# Altium PCB Buckv7.PcbDoc
Units mil, origin at the board's own origin, x right, y up, seen from the top; angles counter-clockwise.
Board outline 6889.76 x 2559.06 mil, 2 copper layers (Top Layer, Bottom Layer); 18 components, 9 nets, 122 pads, 0 vias.
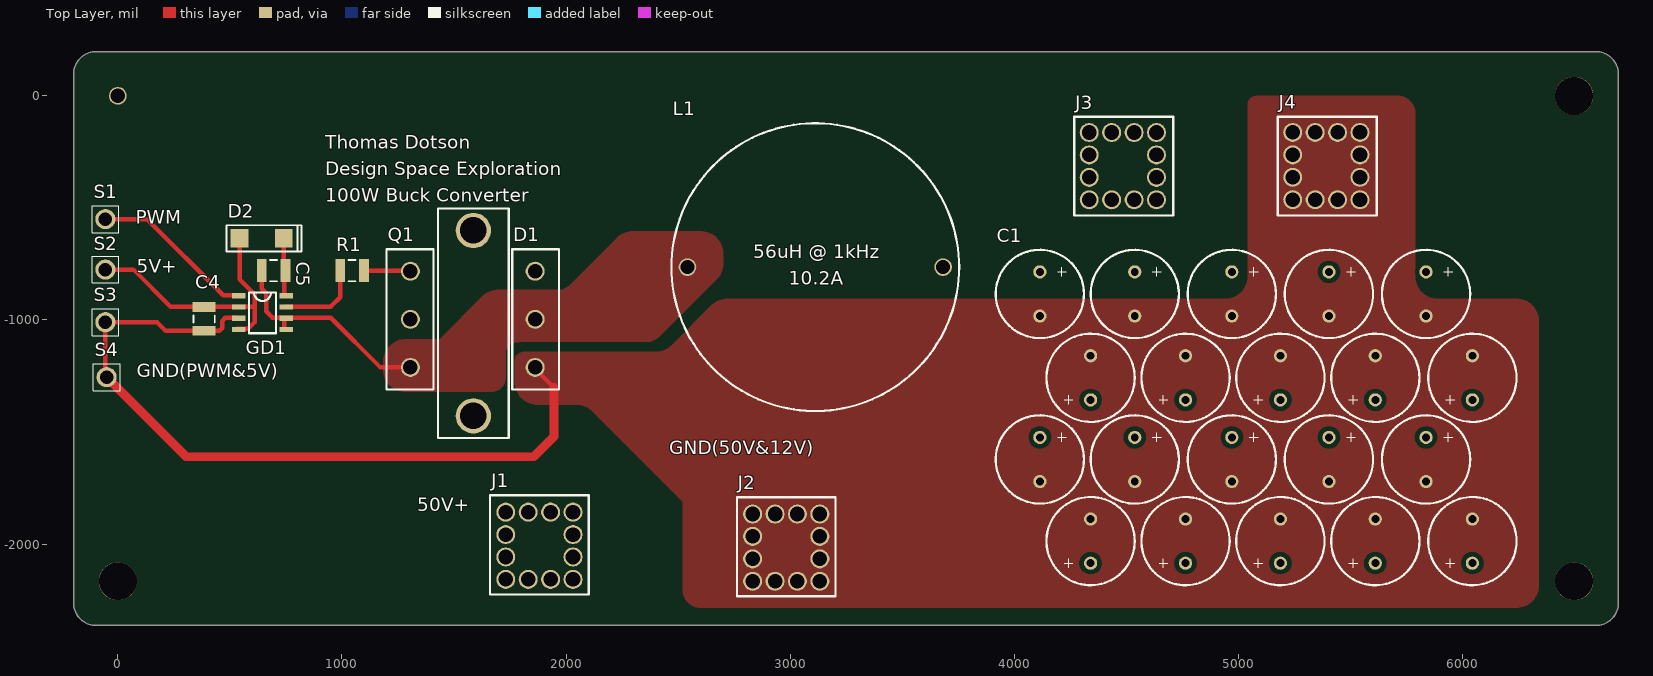
[diagram p0: Top Layer view]
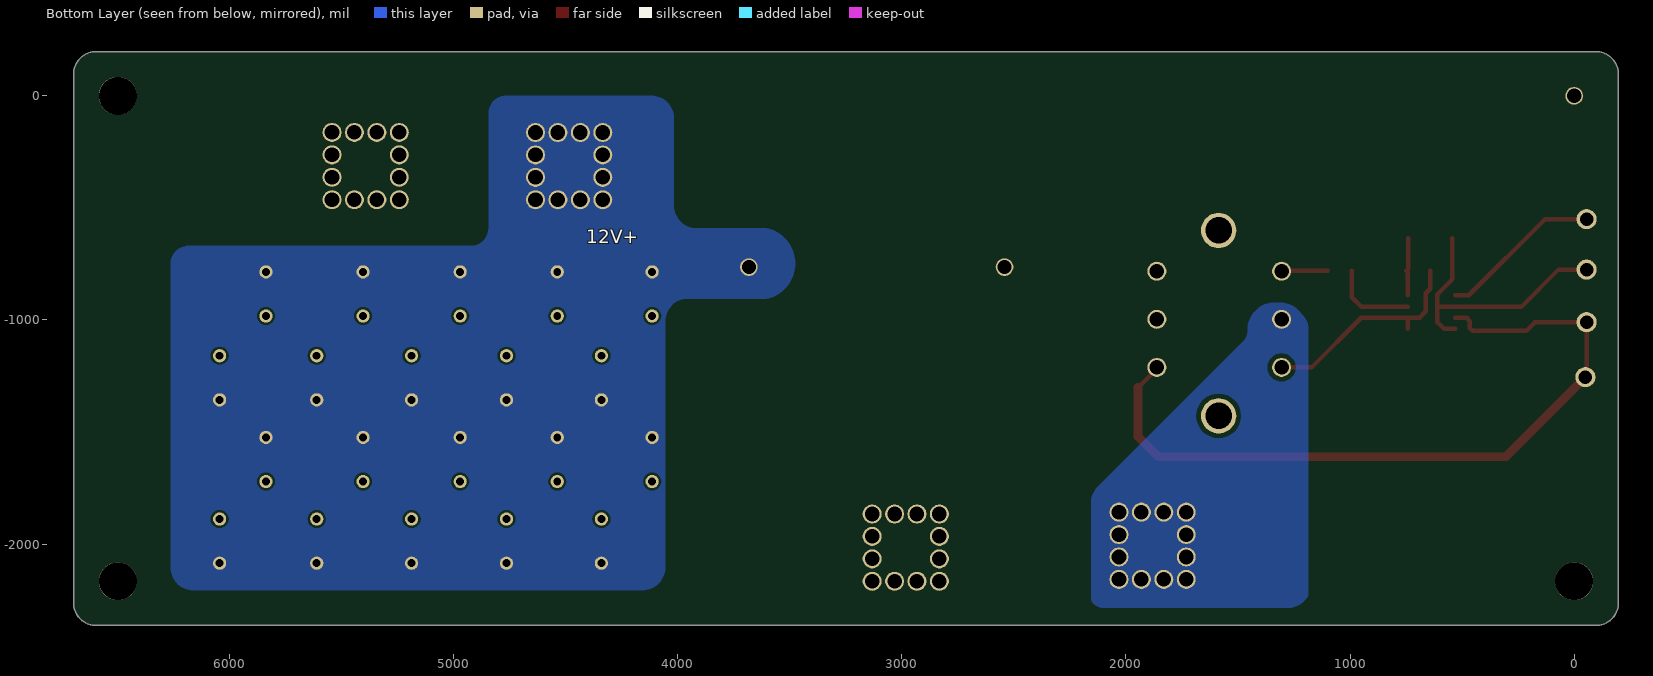
[diagram p1: Bottom Layer view, seen from below]

## Layer stack, top to bottom
Top Solder: solder mask 0.4, Solder Resist, Dk 3.5
Top Layer: signal copper 2.7559
Dielectric 1: dielectric 12.6, FR-4, Dk 4.8
Bottom Layer: signal copper 2.7559
Bottom Solder: solder mask 0.4, Solder Resist, Dk 3.5

## Board outline
-96.85,196.85 ccw(c-96.85,96.85) -196.85,96.85 -196.85,-2262.2 ccw(c-96.85,-2262.2) -96.85,-2362.2 6592.91,-2362.2 ccw(c6592.91,-2262.2) 6692.91,-2262.2 6692.91,96.85 ccw(c6592.91,96.85) 6592.91,196.85
cut-out: 570.39,-3440.16
cut-out: 2405.2,-2853.31

## Design rules (kind name [scope] priority, off if disabled: settings)
Clearance Clearance_1 [InNamedPolygon('Bottom Layer-No Net 8')] p1: gap=10 ignorepadtopadclearanceinfootprint=FALSE except(0: Arc-Hole Track-Hole SMDPad-Hole THPad-Hole Via-Hole Fill-Hole Poly-Hole Region-Hole Text-Hole)
Clearance [All] p2: gap=20 ignorepadtopadclearanceinfootprint=FALSE except(0: Arc-Text Track-Text SMDPad-Text THPad-Text Via-Text Fill-Text Poly-Text Region-Text Text-Text; 10: Arc-SMDPad Track-SMDPad)
ComponentClearance [All] p1: gap=5 collisioncheckmode=3 verticalgap=10 showdistances=FALSE
HoleSize [All] p1: absolutevalues=TRUE maxlimit=180 minlimit=1 maxpercent=80.000 minpercent=20.000
PolygonConnect PolygonConnect_20 [All vs IsNamedPolygon('Top Layer-VG-')] p1: connectstyle=Direct reliefconductorwidth=10 reliefentries=4 polygonreliefangle="90 Angle" airgapwidth=10
PolygonConnect PolygonConnect_19 [All vs IsNamedPolygon('Top Layer-VG-')] p2: connectstyle=Direct reliefconductorwidth=10 reliefentries=4 polygonreliefangle="90 Angle" airgapwidth=10
PolygonConnect PolygonConnect_18 [All vs IsNamedPolygon('Top Layer-VG-')] p3: connectstyle=Direct reliefconductorwidth=10 reliefentries=4 polygonreliefangle="90 Angle" airgapwidth=10
PolygonConnect PolygonConnect_17 [All vs IsNamedPolygon('Top Layer-VG-')] p4: connectstyle=Direct reliefconductorwidth=10 reliefentries=4 polygonreliefangle="90 Angle" airgapwidth=10
PolygonConnect PolygonConnect_16 [All vs IsNamedPolygon('Bottom Layer-No Net 8')] p5: connectstyle=Direct reliefconductorwidth=10 reliefentries=4 polygonreliefangle="90 Angle" airgapwidth=10
PolygonConnect PolygonConnect_15 [All vs IsNamedPolygon('Top Layer-No Net 5')] p6: connectstyle=Direct reliefconductorwidth=10 reliefentries=4 polygonreliefangle="90 Angle" airgapwidth=10
PolygonConnect PolygonConnect_14 [All vs IsNamedPolygon('Top Layer-No Net 7')] p7: connectstyle=Direct reliefconductorwidth=10 reliefentries=4 polygonreliefangle="90 Angle" airgapwidth=10
PolygonConnect PolygonConnect_13 [All vs IsNamedPolygon('Top Layer-No Net')] p8: connectstyle=Direct reliefconductorwidth=10 reliefentries=4 polygonreliefangle="90 Angle" airgapwidth=10
PolygonConnect PolygonConnect_12 [All vs IsNamedPolygon('Bottom Layer-No Net 8')] p9: connectstyle=Direct reliefconductorwidth=10 reliefentries=4 polygonreliefangle="90 Angle" airgapwidth=10
PolygonConnect PolygonConnect_11 [All vs IsNamedPolygon('Top Layer-VG-')] p10: connectstyle=Direct reliefconductorwidth=10 reliefentries=4 polygonreliefangle="90 Angle" airgapwidth=10
PolygonConnect PolygonConnect_10 [All vs IsNamedPolygon('Bottom Layer-No Net 4')] p11: connectstyle=Direct reliefconductorwidth=10 reliefentries=4 polygonreliefangle="90 Angle" airgapwidth=10
PolygonConnect PolygonConnect_9 [All vs IsNamedPolygon('Top Layer-No Net 11')] p12: connectstyle=Direct reliefconductorwidth=10 reliefentries=4 polygonreliefangle="90 Angle" airgapwidth=10
PolygonConnect PolygonConnect_8 [All vs IsNamedPolygon('Top Layer-No Net 12')] p13: connectstyle=Direct reliefconductorwidth=10 reliefentries=4 polygonreliefangle="90 Angle" airgapwidth=10
PolygonConnect PolygonConnect_7 [All vs IsNamedPolygon('Top Layer-No Net 12')] p14: connectstyle=Direct reliefconductorwidth=10 reliefentries=4 polygonreliefangle="90 Angle" airgapwidth=10
PolygonConnect PolygonConnect_6 [All vs IsNamedPolygon('Top Layer-No Net 10')] p15: connectstyle=Direct reliefconductorwidth=10 reliefentries=4 polygonreliefangle="90 Angle" airgapwidth=10
PolygonConnect PolygonConnect_5 [All vs IsNamedPolygon('Top Layer-No Net 10')] p16: connectstyle=Direct reliefconductorwidth=10 reliefentries=4 polygonreliefangle="90 Angle" airgapwidth=10
PolygonConnect PolygonConnect_4 [All vs IsNamedPolygon('Bottom Layer-NetJ1_1')] p17: connectstyle=Direct reliefconductorwidth=10 reliefentries=4 polygonreliefangle="90 Angle" airgapwidth=10
PolygonConnect PolygonConnect_3 [All vs IsNamedPolygon('Top Layer-No Net 6') Or  IsNamedPolygon('Top Overlay-No Net')] p18: connectstyle=Direct reliefconductorwidth=10 reliefentries=4 polygonreliefangle="90 Angle" airgapwidth=10
PolygonConnect PolygonConnect_2 [All vs IsNamedPolygon('Bottom Layer-NetJ1_1')] p19: connectstyle=Direct reliefconductorwidth=10 reliefentries=4 polygonreliefangle="90 Angle" airgapwidth=10
PolygonConnect PolygonConnect_1 [All vs IsNamedPolygon('Bottom Layer-NetJ1_1')] p20: thpad.connectstyle=Direct thpad.reliefconductorwidth=10 thpad.reliefentries=4 thpad.polygonreliefangle="90 Angle" thpad.airgapwidth=10 smdpad.connectstyle=Relief smdpad.reliefconductorwidth=10 smdpad.reliefentries=4 smdpad.polygonreliefangle="90 Angle" smdpad.airgapwidth=10 via.connectstyle=Relief via.reliefconductorwidth=10 via.reliefentries=4 via.polygonreliefangle="90 Angle" via.airgapwidth=10
PolygonConnect [All] p21: connectstyle=Relief reliefconductorwidth=10 reliefentries=4 polygonreliefangle="90 Angle" airgapwidth=10
RoutingVias [All] p1: holewidth=28 width=50 viastyle="Through Hole" minholewidth=28 minwidth=50 maxholewidth=28 maxwidth=50
SolderMaskExpansion [All] p1: expansion=4
Width [All] p1: maxlimit=393.7 minlimit=10 preferedwidth=10 minimp=50.000000 maximp=50.000000 favimp=50.000000
28 further rules are at their usual default settings.

## Classes and differential pairs
component class Buckv5: C1 C4 C5 D1 D2 GD1 J1 J2 J3 J4 L1 Q1 R1 S1 S2 S3 S4

## Components (designator, comment, footprint, x,y, rotation, side; value= is the part's Value field where it differs from the comment)
* "CR301-25VE Heatsink" CR301-25VE 1586.06,-522.05 r90 top
C1 "470uF" "EPCOS TDK B4851" 6041.85,-1996.06 r180 top
C4 "Cap Semi" C1210 385,-995 r90 top value=10uF
C5 "Cap Semi" C1210 695,-780 r0 top value=1uF
D1 "Diode" TO-247AC 1963.66,-1310.08 r90 top
D2 "Diode" SOD128Diode 641.57,-635 r0 top
GD1 "Si8271" "IPC-7351 SOIC127P600X173-8N" 539.37,-892.13 r0 top
J1 "Bush7460408" Bush7460408 1730.39,-2157.09 r90 top
J2 "Bush7460408" Bush7460408 2831.5,-2165.35 r90 top
J3 "Bush7460408" Bush7460408 4332.91,-163.82 r0 top
J4 "Bush7460408" Bush7460408 5240.51,-163.43 r0 top
L1 "Bourns M8836-ND" "Bourns M8836-ND" 3111.02,-764.17 r0 top (schematic designator *)
Q1 "Infineon IRFP150NPbF" "Infineon IRFP150NPbF" 1407.76,-684.09 r270 top
R1 "Res3" 14-1210 1045,-780 r0 top value=22
S1 "VPWM" Sensor_Connecter -55,-550 r90 top
S2 "5V" Sensor_Connecter -55,-775 r90 top
S3 "GNDI" Sensor_Connecter -55,-1010 r90 top
S4 "GND_PWM" Sensor_Connecter -50,-1255 r0 top

## Footprints (in the part's own frame and the unit in brackets; to place one, negate y for a bottom-side part, rotate by r counter-clockwise, add the part's x,y. Pads: shape width x height; smd on the part's side, far side on the other; paste and mask are expansions set on the pad)
14-1210 [mm] "Chip Resistor, Body 3.2x2.5mm, IPC High Density"
  rect 1.1x2.6 smd: 1(-1.35,0) 2(1.35,0)
  silkscreen extent -0.4,-1.2 0.4,1.2, body extent -1.68,-1.32 1.68,1.32, height 0.9
"Bourns M8836-ND" [mm]
  round 2 hole 1.6: 1(-14.478,0) 2(14.478,0)
  silkscreen extent -16.3,-16.3 16.3,16.3
Bush7460408 [mm] "Power Connecter 12pin"
  round 2.15 hole 1.65: 1(0,0) 1(0,-2.54) 1(0,-5.08) 1(0,-7.62) 1(2.54,0) 1(2.54,-7.62) 1(5.08,0) 1(5.08,-7.62) 1(7.62,-7.62) 1(7.62,-5.08) 1(7.62,-2.54) 1(7.62,0)
  silkscreen extent -1.7,-9.4 9.53,1.78, body extent -1.83,-9.53 9.65,1.91, height 7
C1210 [mm] "Chip Capacitor, Body 3.2x2.5mm, IPC High Density"
  rect 1.1x2.6 smd: 1(-1.35,0) 2(1.35,0)
  silkscreen extent -0.4,-1.2 0.4,1.2, body extent -1.7,-1.35 1.7,1.35, height 1.3
CR301-25VE [mm] "Ohmite Heatsink   CR301-25VE Mouser 588-CR301-25VE"
  round 4 hole 3: 1(-23,0) 1(-2,0)
  silkscreen extent -25.5,-4 0.5,4
"EPCOS TDK B4851" [mm] "Aluminum Electrolytic Cap 100V 47uF x 10 Digikey 495-5978-ND"
  round 1.5 hole 0.9: 1(0,2.25) 1(0,-16.25) 1(5.25,-12) 1(5.25,-30.75) 1(11,2.25) 1(11,-16.25) 1(16.25,-30.75) 1(16.25,-12) 1(21.75,2.25) 1(21.75,-16.25) 1(27.25,-12) 1(27.25,-30.75) 1(32.5,-16.25) 1(32.5,2.25) 1(38.25,-12) 1(38.25,-30.75) 1(43.25,-16.25) 1(43.25,2.25) 1(49,-12) 1(49,-30.75) 2(0,-2.75) 2(0,-21.25) 2(5.25,-7) 2(5.25,-25.75) 2(11,-2.75) 2(11,-21.25) 2(16.25,-7) 2(16.25,-25.75) 2(21.75,-2.75) 2(21.75,-21.25) 2(27.25,-7) 2(27.25,-25.75) 2(32.5,-21.25) 2(32.5,-2.75) 2(38.25,-7) 2(38.25,-25.75) 2(43.25,-21.25) 2(43.25,-2.75) 2(49,-7) 2(49,-25.75)
  silkscreen extent -5,-33.25 54,4.75
"Infineon IRFP150NPbF" [mm]
  round 2.15 hole 1.65: 1(2.5,-2.6) 2(7.95,-2.6) 3(13.4,-2.6)
  silkscreen extent 0,-5.3 15.9,0
"IPC-7351 SOIC127P600X173-8N" [mm]
  rect 1.55x0.6 smd: 1(0,0) 2(0,-1.27) 3(0,-2.54) 4(0,-3.81) 5(5.4,-3.81) 6(5.4,-2.54) 7(5.4,-1.27) 8(5.4,0)
  silkscreen extent 1.15,-4.24 4.24,0.39
Sensor_Connecter [mil]
  round 90 hole 60: 1(0,0)
  silkscreen extent -60,-60 60,60
SOD128Diode [mm]
  rect 2x2.1 smd: A(-2.5,0) C(2.5,0)
  silkscreen extent -3.98,-1.5 4.52,1.48
TO-247AC [mm]
  round 2.15 hole 1.65: 1(2.5,2.598) 2(7.95,2.598) 3(13.4,2.598)
  silkscreen extent 0,-0.1 15.9,5.2

## Part data
*: "Ohmite Heatsink   CR301-25VE Mouser 588-CR301-25VE"
C4: "CAP CER 10UF 50V X7S 1210 @Digikey 445-4537-1-ND or C3225X7S1H106M250AB", LatestRevisionDate=29-May-2009, LatestRevisionNote="IPC-7351 Footprint Added.", PackageDescription="Chip Capacitor", PackageReference=C1206, Published=8-Jun-2000, Publisher="Altium Limited"
C5: "Samsung Electro-Mechanics CAP Ceramic 1uF 50V Digikey 1276-1811-1-ND", LatestRevisionDate=29-May-2009, LatestRevisionNote="IPC-7351 Footprint Added.", PackageDescription="Chip Capacitor", PackageReference=C1206, Published=8-Jun-2000, Publisher="Altium Limited"
D1: library part "Vishay Semiconductors VS-STPS30L60CW-N3", "Vishay Semiconductors Schottky Rectifier Diode / Digikey VS-STPS30L60CW-N3GI-ND"
D2: "Schottky Diode 30V 5A / Digikey 568-6519-1-ND"
GD1: "8-Pin Gate Driver"
R1: "Stackpole Electronics Resistor 22 Ohms / 0.5W Digikey RMCF1210JT22R0TR-ND", LatestRevisionDate=29-May-2009, LatestRevisionNote="IPC-7351 Footprint Added.", PackageDescription="Chip Resistor", PackageReference=J1-0603, Published=8-Jun-2000, Publisher="Altium Limited"
S1 S2 S3 S4: library part Sensor_Connecter, "Sensor Connecter"

## Free pads (board coordinates)
  round 78.74 hole 62.99: 3(0,0)
  round 169.29 hole 169.29 unplated: 4(0,-2165.35) 5(6496.06,-2165.35) 6(6496.06,0)

## Nets (pads, with @x,y where several pads share a name; then routed paths per layer and width w, separated by ;. In a path a pad name is that pad's centre, name@x,y a point inside that pad or via, vN(x,y) a via of type N, cw(c..) or ccw(c..) an arc to the next point about the centre after c; other vN are vias at no path point)
GND: C1.2 C4.1 D1.1 GD1.3 J2.1 J4.1 S3.1 S4.1 | length 3415.1
  Top Layer w20: S4.1 -55,-1250 S3.1 175,-1010 213.15,-1048.15 C4.1 453.15,-1048.15 465,-1036.3 465,-1005 480,-990 GD1.3@530,-990 ; D1.1@1855.39,-1211.65 1945,-1301.26
  Top Layer w40: S4.1 305,-1610 1855,-1610 1945,-1520 1945,-1301.26
NetC1_1: C1.1 J3.1 L1.2
NetC4_2: C4.2 D2.A GD1.2 GD1.4 S2.1 | length 1230
  Top Layer w20: S2.1 70,-775 236.85,-941.85 C4.2 528.15,-941.85 530,-940 610,-940 ; GD1.4@530,-1040 580,-1040 610,-1010 610,-940 ; D2.A 543.15,-818.4 610,-885.25 610,-940
NetC5_2: C5.2 D2.C GD1.8 | length 260.7
  Top Layer w20: D2.C 740,-771.85 C5.2 742.6,-785.55 GD1.8@742.6,-890
NetGD1_1: GD1.1 S1.1 | length 725.8
  Top Layer w20: S1.1 130,-550 470,-890 GD1.1@530,-890
NetGD1_7: GD1.7 R1.1 | length 384.7
  Top Layer w20: GD1.7@742.6,-940 950,-940 991.85,-898.15 R1.1
NetJ1_1: J1.1 Q1.2
VG+: Q1.1 R1.2 | length 208.7
  Top Layer w10: Q1.1@1302.87,-780 cw(c1302.87,-782.52) Q1.1
  Top Layer w20: R1.2 Q1.1@1302.87,-780
VG-: C5.1 D1.2 GD1.5 GD1.6 L1.1 Q1.3 | length 992.1
  Top Layer w20: C5.1 641.85,-860.53 661.57,-880.26 661.57,-961.57 690,-990 GD1.6@742.6,-990 ; GD1.5@742.6,-1040 GD1.6@742.6,-990 ; Q1.3@1310.39,-1211.65 1171.65,-1211.65 950,-990 GD1.6@742.6,-990
pads on no net: *.1 D1.3

## Polygon pours and split planes (outlines as drawn)
no net on Top Overlay (solid): 1042.44,-977.72
no net on Top Overlay (solid): 2637.8,-1102.36
no net on Top Overlay (solid): 2637.8,-944.88
no net on Top Overlay (solid): 4921.26,-354.33
VG- on Top Layer "Top Layer-VG-" (solid, pour order 253): 1185,-1225 ccw(c1280,-1225) 1280,-1320 1660,-1320 ccw(c1667.5,-1257.5) 1730,-1265 1730,-1145 cw(c1782.5,-1152.5) 1790,-1100 2348.58,-1100 ccw(c2348.58,-1000) 2419.29,-1070.71 2671.72,-818.28 ccw(c2603.43,-750) 2700,-750 2700,-705 ccw(c2600,-705) 2600,-605 2296.42,-605 ccw(c2296.42,-704.99) 2225.71,-634.29 2015,-845 cw(c1966.72,-796.72) 1966.72,-865 1696.42,-865 ccw(c1696.42,-964.99) 1625.71,-894.29 1435,-1085 1285,-1085 ccw(c1285,-1185) 1185,-1185
no net on Top Layer "Top Layer-No Net 6" (solid, pour order 249): 1720,-1150
no net on Top Layer "Top Layer-No Net 5" (solid, pour order 235): 1180,-1110
no net on Top Layer "Top Layer-No Net 4" (solid, pour order 120): 727.28,-1503.11
no net on Top Layer "Top Layer-No Net 3" (solid, pour order 122): 1111.18,-2322.83
no net on Top Layer "Top Layer-No Net 2" (solid, pour order 124): 854.8,-2037.4
no net on Top Layer "Top Layer-No Net 1" (solid, pour order 132): 1230.32,-1171.26
no net on Top Layer "Top Layer-No Net 9" (solid, pour order 173): 2637.8,-1161.42
no net on Top Layer "Top Layer-No Net 8" (solid, pour order 175): 2637.8,-1171.26
no net on Top Layer "Top Layer-No Net 7" (solid, pour order 181): 1259.84,-1161.42
no net on Top Layer "Top Layer-No Net 10" (solid, pour order 199): 2316.93,-2850.39
no net on Top Layer "Top Layer-No Net 13" (solid, pour order 207): 2204.72,-501.97
no net on Top Layer "Top Layer-No Net 12" (solid, pour order 211): 1265.2,-2283.31
GND on Top Layer "Top Layer-No Net" (solid, pour order 215): 2598.43,-2283.46 cw(c2598.43,-2204.72) 2519.68,-2204.72 2519.68,-1811.02 2115.9,-1407.24 ccw(c2045.19,-1477.95) 2045.19,-1377.95 1871.65,-1377.95 cw(c1871.65,-1277.95) 1771.65,-1277.95 1771.65,-1181.1 cw(c1811.02,-1181.1) 1811.02,-1141.73 2399.52,-1141.73 ccw(c2399.52,-1041.73) 2470.23,-1112.44 2647.88,-934.8 cw(c2718.59,-1005.51) 2718.59,-905.51 4939.37,-905.51 ccw(c4939.37,-805.51) 5039.37,-805.51 5039.37,-39.37 cw(c5078.74,-39.37) 5078.74,0 5708.66,0 cw(c5708.66,-78.74) 5787.4,-78.74 5787.4,-805.51 ccw(c5887.4,-805.51) 5887.4,-905.51 6238.58,-905.51 cw(c6238.58,-1005.51) 6338.58,-1005.51 6338.58,-2183.46 cw(c6238.58,-2183.46) 6238.58,-2283.46
NetC1_1 on Bottom Layer "Bottom Layer-No Net 8" (solid, pour order 219): 3600.79,-590.55 ccw(c3636.94,-748.03) 3600.79,-905.51 3955.12,-905.51 cw(c3955.12,-1005.51) 4055.12,-1005.51 4055.12,-2104.72 ccw(c4155.12,-2104.72) 4155.12,-2204.72 6159.84,-2204.72 ccw(c6159.84,-2104.72) 6259.84,-2104.72 6259.84,-748.03 ccw(c6181.1,-748.03) 6181.1,-669.29 4921.26,-669.29 cw(c4921.26,-590.55) 4842.52,-590.55 4842.52,-78.74 ccw(c4763.78,-78.74) 4763.78,0 4115.75,0 ccw(c4115.75,-100) 4015.75,-100 4015.75,-490.55 cw(c3915.75,-490.55) 3915.75,-590.55
NetJ1_1 on Bottom Layer "Bottom Layer-No Net 4" (solid, pour order 209): 2105.2,-2283.31 ccw(c2105.2,-2235.02) 2139.34,-2269.16 2145.2,-2263.31 ccw(c2121.06,-2239.17) 2155.2,-2239.16 2155.2,-1814.73 ccw(c2055.2,-1814.73) 2125.91,-1744.02 1476.41,-1094.52 cw(c1527.62,-1043.31) 1455.2,-1043.31 1455.2,-1034.73 ccw(c1355.2,-1034.73) 1425.91,-964.02 1414.49,-952.6 ccw(c1343.78,-1023.31) 1343.78,-923.31 1306.62,-923.31 ccw(c1306.62,-1023.31) 1235.91,-952.6 1214.49,-974.02 ccw(c1285.2,-1044.73) 1185.2,-1044.73 1185.2,-2219.16 ccw(c1219.34,-2219.17) 1195.2,-2243.31 1195.91,-2244.02 ccw(c1277.98,-2180.02) 1265.2,-2283.31
no net on Bottom Layer "Bottom Layer-No Net 1" (solid, pour order 153): 500.08,-1216.46
no net on Bottom Layer "Bottom Layer-No Net" (solid, pour order 159): 2007.87,-2204.72
no net on Bottom Layer "Bottom Layer-No Net 3" (solid, pour order 189): 2017.72,-2214.57
no net on Bottom Layer "Bottom Layer-No Net 2" (solid, pour order 195): 1141.73,-1751.97
no net on Bottom Layer "Bottom Layer-No Net 7" (solid, pour order 221): 5118.11,314.96
no net on Bottom Layer "Bottom Layer-No Net 6" (solid, pour order 225): 1299.21,-2913.39
no net on Bottom Layer "Bottom Layer-No Net 5" (solid, pour order 229): 708.66,-3070.87

## Silkscreen, mask and mechanical layers (free items; w line width, h text height)
Top Overlay:
  text "Thomas Dotson" at 925.2,-236.22 h60
  text "Design Space Exploration" at 925.2,-354.33 h60
  text "100W Buck Converter" at 925.2,-472.44 h60
  text "PWM" at 80,-570 h60
  text "5V+" at 85,-790 h60
  text "GND(PWM&5V)" at 85,-1255 h60
  text "GND(50V&12V)" at 2460.63,-1598.43 h60
  text "50V+" at 1335.2,-1853.31 h60
Bottom Overlay:
  text "12V+" at 4405.51,-657.48 h60

## Text inside footprints (layer, text, board x,y; h text height)
L1: Top Overlay "10.2A" at 2992.91,-842.91 h60; Top Overlay "56uH @ 1kHz" at 2835.43,-724.8 h60